# Altium PCB Modules.PcbDoc
Units mil, origin at the board's own origin, x right, y up, seen from the top; angles counter-clockwise.
Board outline 2267.75 x 2326.8 mil, 2 copper layers (Top Layer, Bottom Layer); 30 components, 60 nets, 125 pads, 7 vias.
Unrouted connection lines stored in the file: 1.
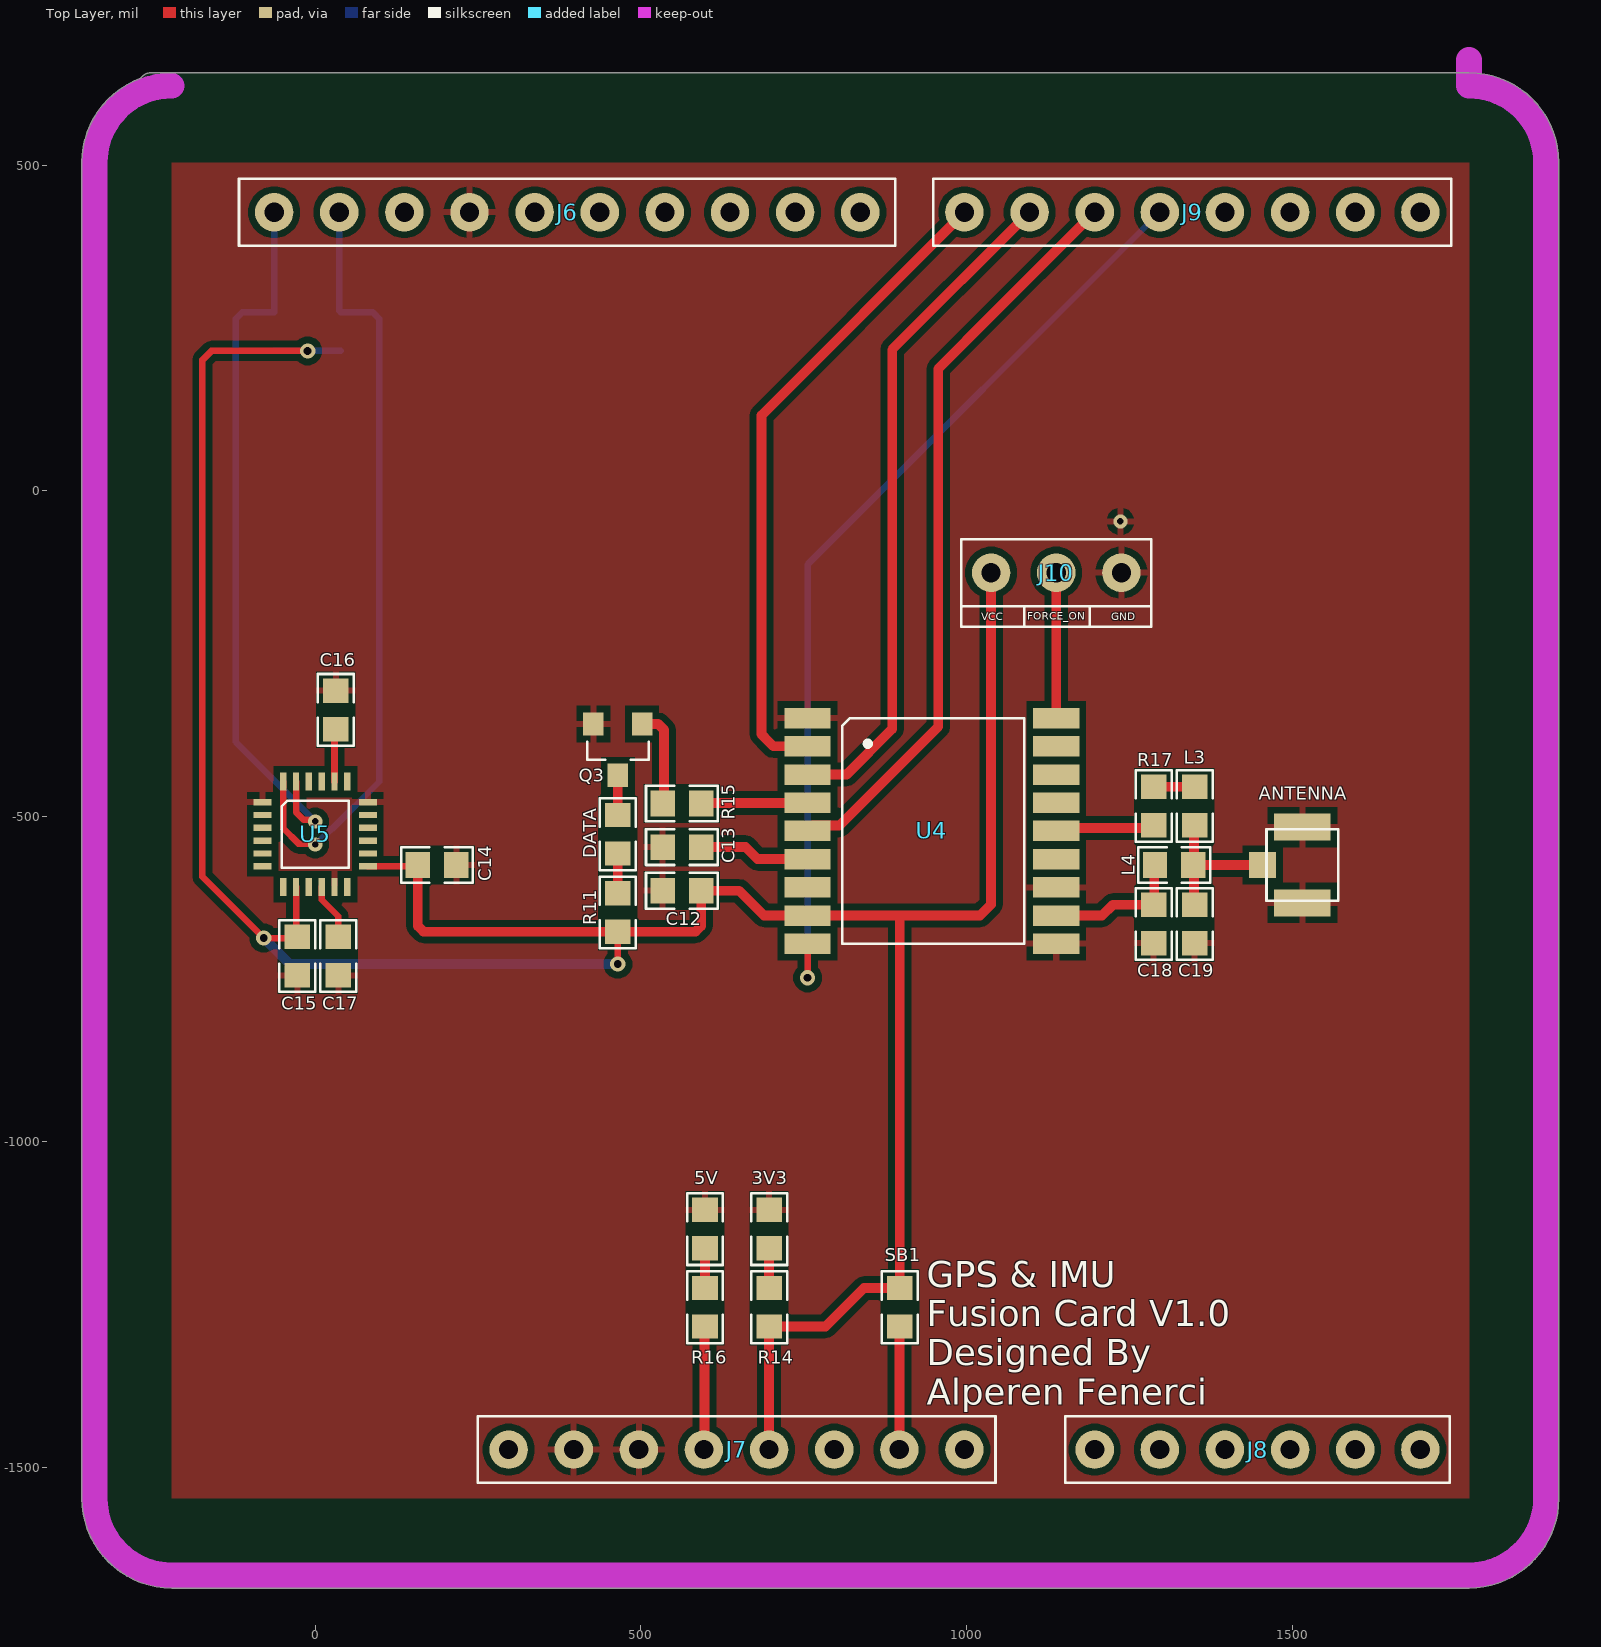
[diagram p0: Top Layer view]
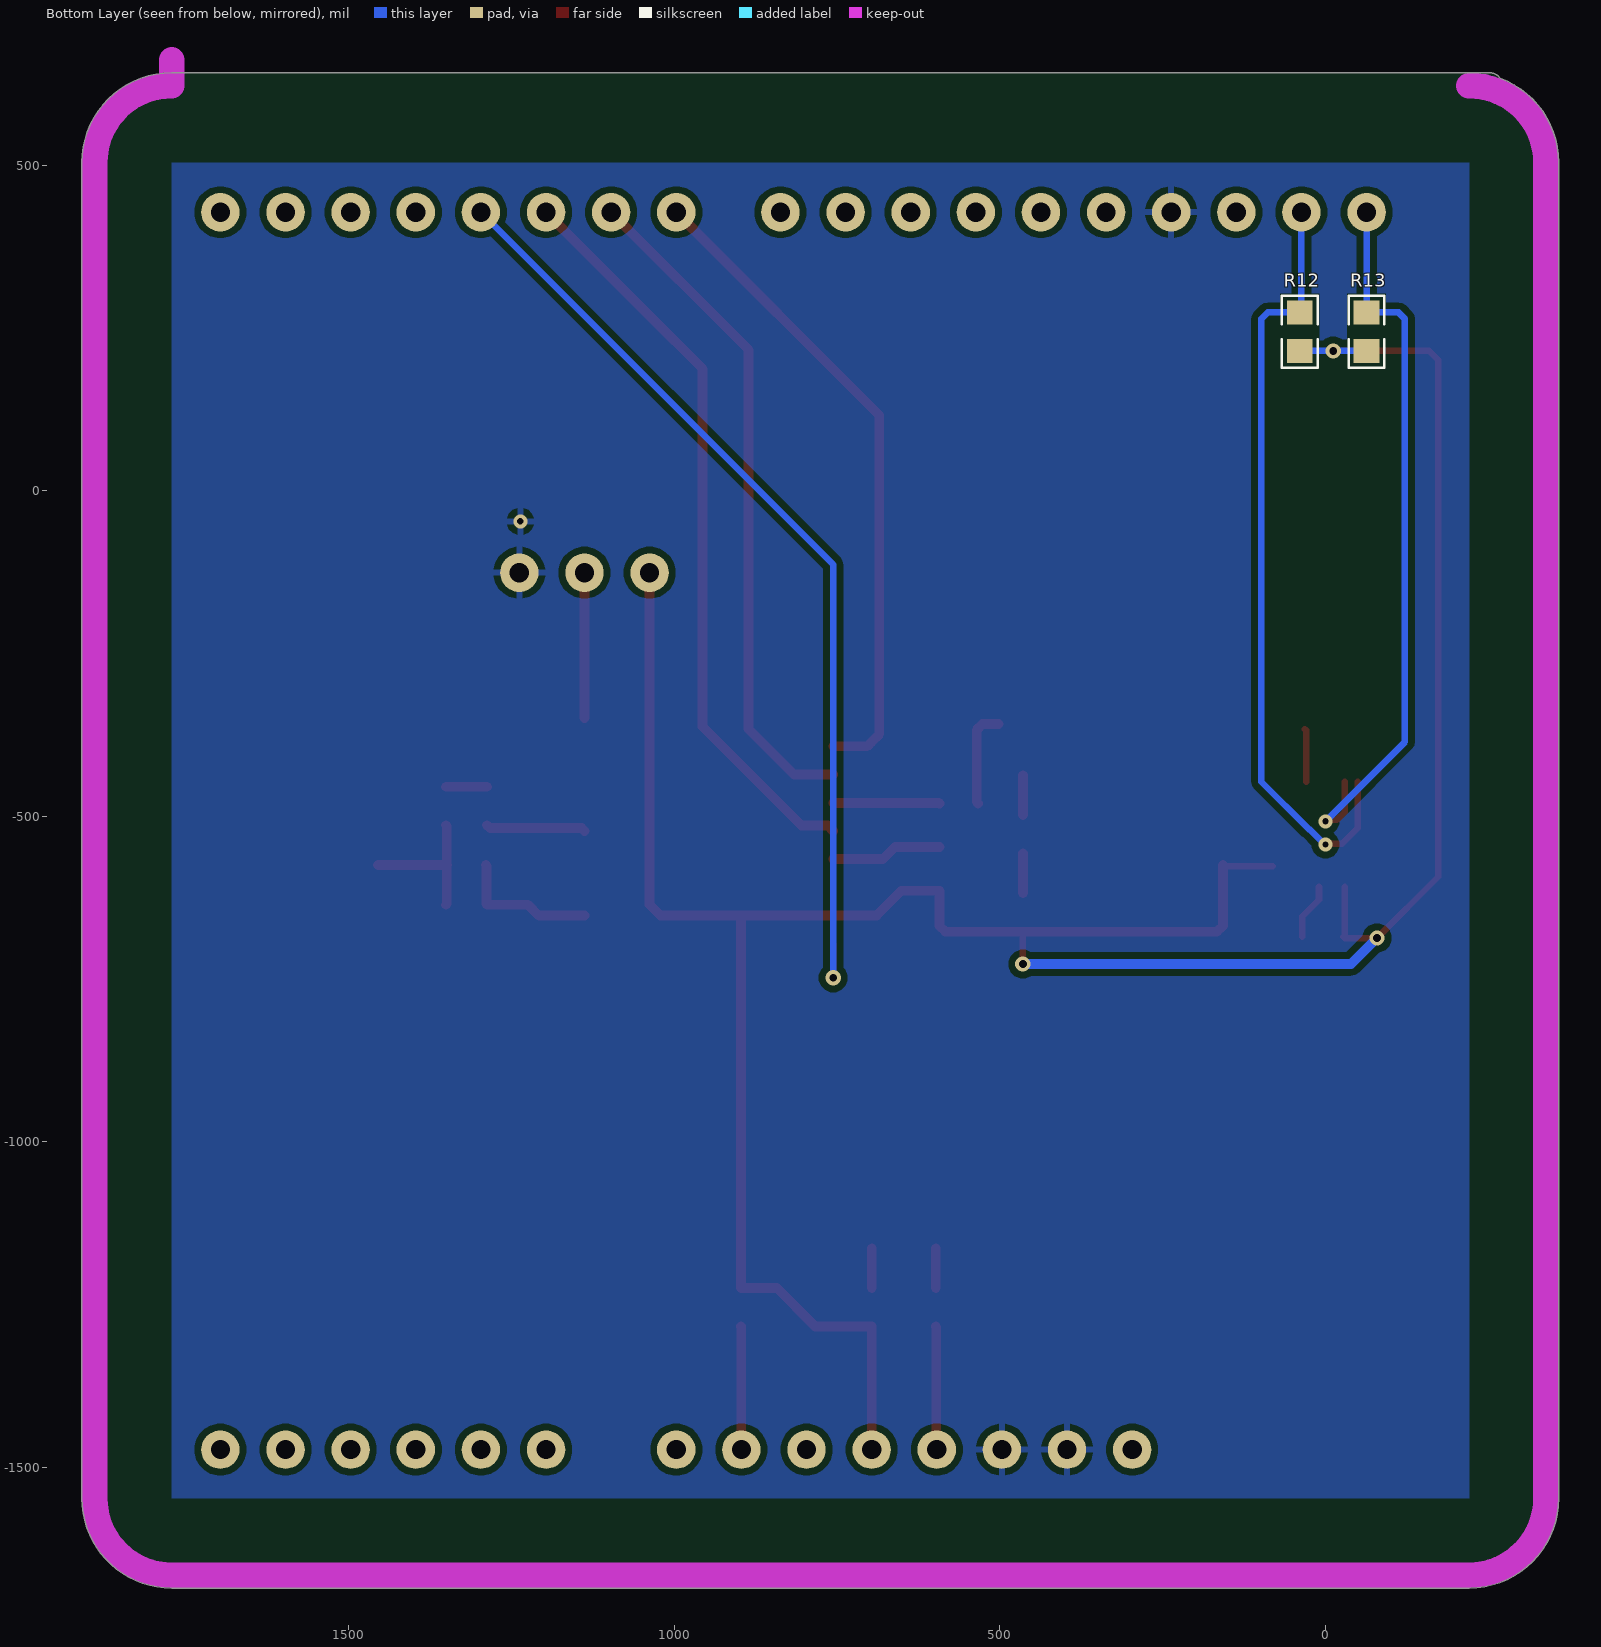
[diagram p1: Bottom Layer view, seen from below]
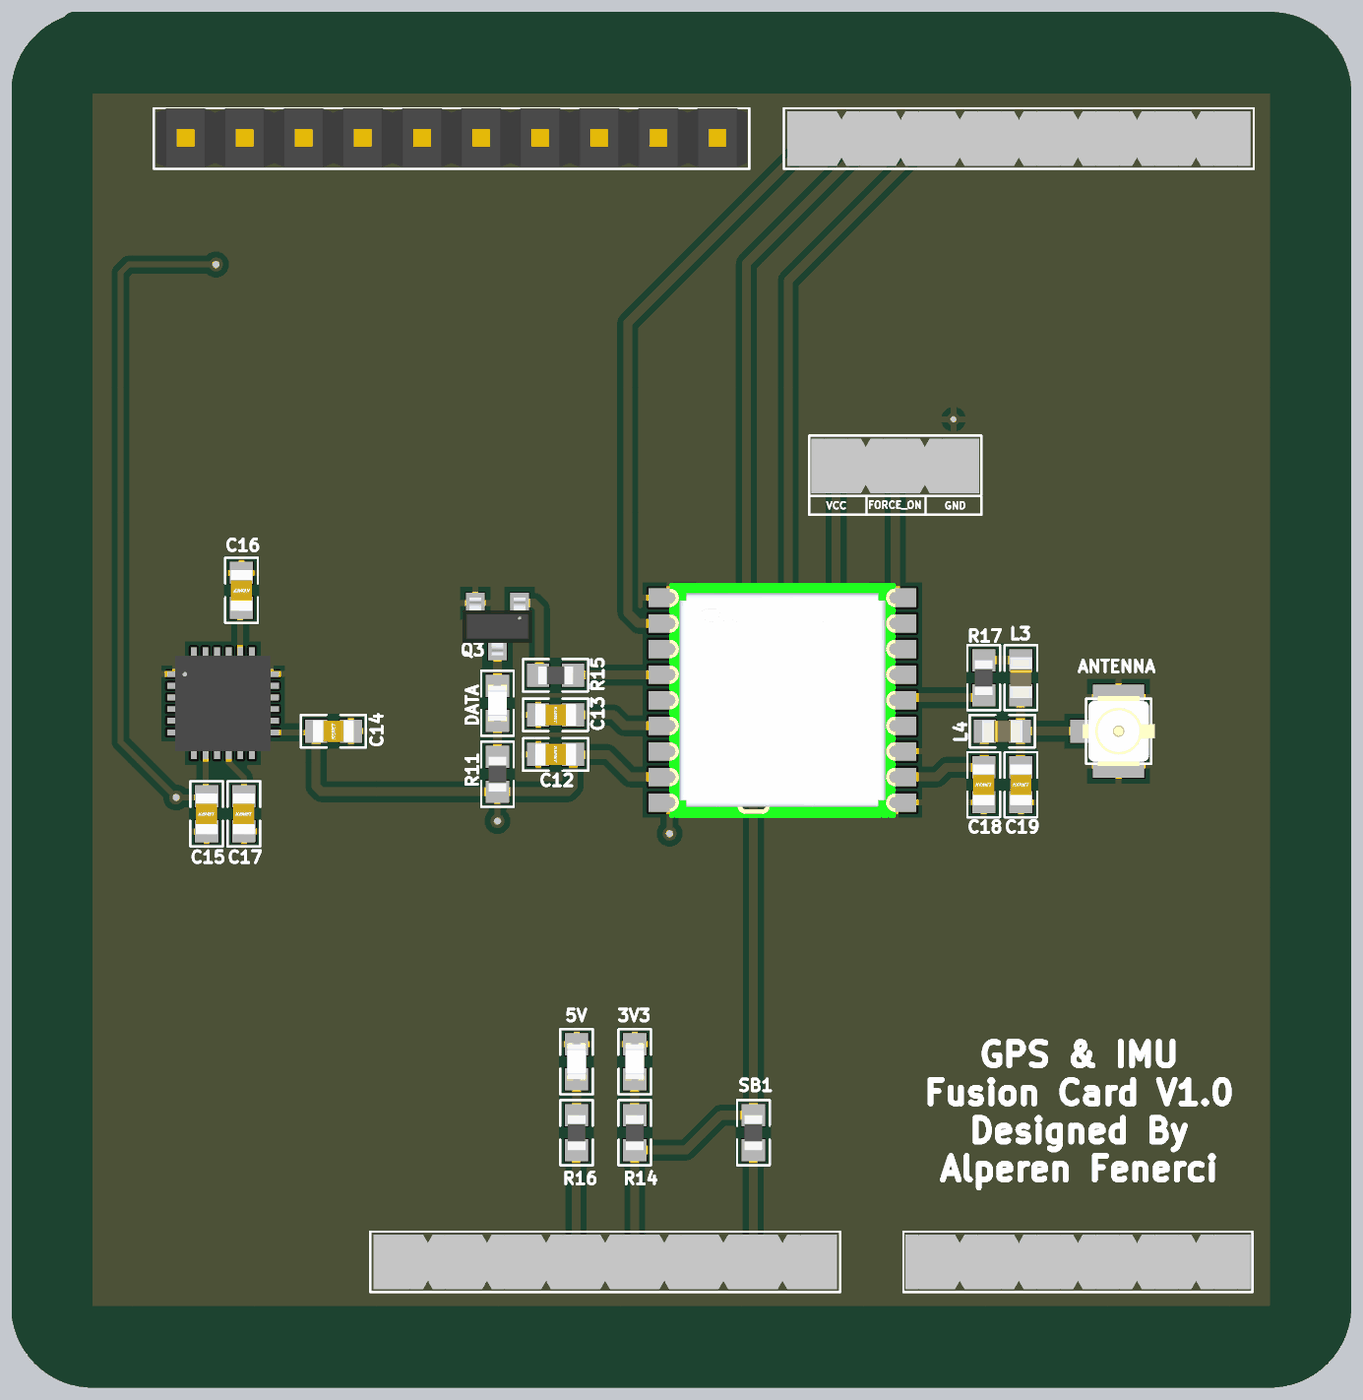
[diagram p2: 3D render of the assembled board from above, using the file's embedded part models]

## Layer stack, top to bottom
Top Solder: solder mask 0.4, Solder Resist, Dk 3.5
Top Layer: signal copper 1.4
Dielectric 1: dielectric 12.6, FR-4, Dk 4.8
Bottom Layer: signal copper 1.4
Bottom Solder: solder mask 0.4, Solder Resist, Dk 3.5

## Board outline
-358.28,-1547.36 -358.28,503.94 cw(c-220.47,503.94) -268.19,633.22 cw(c-251.97,622.05) -251.97,641.75 -220.41,641.75 1169.29,641.75 1169.35,641.75 1771.65,641.75 1771.72,641.75 cw(c1771.65,503.94) 1909.46,503.94 1909.46,-1547.14 1909.46,-1547.24 cw(c1771.65,-1547.24) 1771.65,-1685.05 -220.36,-1685.05 -220.47,-1685.05 cw(c-220.47,-1547.24)

## Design rules (kind name [scope] priority, off if disabled: settings)
Clearance [All] p1: gap=10 ignorepadtopadclearanceinfootprint=FALSE except(0: Arc-Hole Track-Hole SMDPad-Hole THPad-Hole Via-Hole Fill-Hole Poly-Hole Region-Hole Text-Hole; 8: Arc-Arc Arc-Track Arc-SMDPad Track-Track Track-SMDPad Fill-Fill Fill-Poly Fill-Region Poly-Poly Poly-Region Region-Region)
PolygonConnect [All] p1: connectstyle=Relief reliefconductorwidth=10 reliefentries=4 polygonreliefangle="90 Angle" airgapwidth=10
RoutingVias [All] p1: holewidth=28 width=50 viastyle="Through Hole" minholewidth=28 minwidth=50 maxholewidth=28 maxwidth=50
SolderMaskExpansion [All] p1: expansion=4 istentingtop=FALSE
Width [All] p1: maxlimit=50 minlimit=10 preferedwidth=10 minimp=50.000000 maximp=50.000000 favimp=50.000000
30 further rules are at their usual default settings.

## Classes and differential pairs
component class GOMSIS: 3V3 5V C12 C13 C14 C15 C16 C17 C18 C19 J6 J7 J8 J9 J10 L3 L4 Q3 R11 R12 R13 R14 R15 R16 R17 SB1 U4 U5

## Components (designator, comment, footprint, x,y, rotation, side; value= is the part's Value field where it differs from the comment)
3V3 "LTW-C191TLA" "LED 0603" 696.85,-1133.86 r270 top (schematic designator D7)
5V "LTW-C191TLA" "LED 0603" 598.43,-1133.86 r270 top (schematic designator D8)
ANTENNA "UFL Connector" "UFL CONN" 1515.75,-574.8 r270 top (schematic designator AE2)
C12 "CAP 0603" "CAP 0603" 562.99,-614.17 r180 top value=0.1uF
C13 "CAP 0603" "CAP 0603" 562.99,-547.24 r180 top value=6.8nF
C14 "CAP 0603" "CAP 0603" 187.01,-574.8 r0 top value=0.1uF
C15 "CAP 0603" "CAP 0603" -27.56,-714.57 r270 top value=0.1uF
C16 "CAP 0603" "CAP 0603" 31.5,-336.61 r90 top value=2.2nF
C17 "CAP 0603" "CAP 0603" 35.43,-714.57 r270 top value=0.1uF
C18 "CAP 0603" "CAP 0603" 1287.4,-665.35 r270 top value=10nF
C19 "CAP 0603" "CAP 0603" 1350.39,-665.35 r270 top value=10nF
DATA "LTW-C191TLA" "LED 0603" 464.57,-527.56 r270 top (schematic designator D6)
J6 "HMATHT00C101" HMATHT00C101 386.85,427.56 r0 top
J7 "HMATHT00C81" "HMATHT00C81 - DUPLICATE" 646.85,-1472.44 r180 top
J8 "5-146285-6" HMATHT00C61 1446.85,-1472.44 r180 top
J9 "HMATHT00C81" "HMATHT00C81 - DUPLICATE" 1346.85,427.56 r180 top
J10 "146285-3" HMATHT00C31 1137.8,-125.98 r0 top
L3 "IND 0603" "INDUCTOR 0603" 1350.39,-484.25 r270 top
L4 "IND 0603" "INDUCTOR 0603" 1318.9,-574.8 r0 top
Q3 "BC817-40" SOT23-3 464.57,-397.64 r180 top
R11 "RES 0603" "RESISTOR 0603" 464.57,-647.64 r270 top value=220R
R12 "RES 0603" "RESISTOR 0603" 39.37,244.09 r270 bottom value=10kR
R13 "RES 0603" "RESISTOR 0603" -62.99,244.09 r270 bottom value=10kR
R14 "RES 0603" "RESISTOR 0603" 696.85,-1253.94 r90 top value=330R
R15 "RES 0603" "RESISTOR 0603" 562.99,-480.31 r0 top value=10kR
R16 "RES 0603" "RESISTOR 0603" 598.43,-1253.94 r90 top value=330R
R17 "RES 0603" "RESISTOR 0603" 1287.4,-484.25 r90 top value=1kR
SB1 "RES 0603" "RESISTOR 0603" 897.64,-1253.94 r270 top value=1kR
U4 "L76M33" L76M33 946.85,-522.44 r180 top
U5 "MPU6050" QFN24 0,-527.56 r0 top

## Footprints (in the part's own frame and the unit in brackets; to place one, negate y for a bottom-side part, rotate by r counter-clockwise, add the part's x,y. Pads: shape width x height; smd on the part's side, far side on the other; paste and mask are expansions set on the pad)
"CAP 0603" [mm]
  rect 0.95x1 smd mask+0.05: 1(-0.75,0) 2(0.75,0)
  silkscreen extent -1.4,-0.7 1.4,0.7, body extent -0.88,-0.47 0.88,0.48, height 0.95
HMATHT00C31 [mm]
  round 1.5 hole 0.75 mask+0.05: 1(-2.54,0) 2(0,0) 3(2.54,0)
  silkscreen extent -3.7,-1.3 3.7,1.3, body extent -3.61,-1.17 3.61,1.17, height 4.58
HMATHT00C61 [mm]
  round 1.5 hole 0.75 mask+0.05: 1(-6.35,0) 2(-3.81,0) 3(-1.27,0) 4(1.27,0) 5(3.81,0) 6(6.35,0)
  silkscreen extent -7.5,-1.3 7.5,1.3, body extent -7.42,-1.17 7.42,1.17, height 4.58
"HMATHT00C81 - DUPLICATE" [mm]
  round 1.5 hole 0.75 mask+0.05: 1(-8.89,0) 2(-6.35,0) 3(-3.81,0) 4(-1.27,0) 5(1.27,0) 6(3.81,0) 7(6.35,0) 8(8.89,0)
  silkscreen extent -10.1,-1.3 10.1,1.3, body extent -9.96,-1.17 9.96,1.17, height 5.33
HMATHT00C101 [mm]
  round 1.5 hole 0.75 mask+0.05: 1(-11.43,0) 2(-8.89,0) 3(-6.35,0) 4(-3.81,0) 5(-1.27,0) 6(1.27,0) 7(3.81,0) 8(6.35,0) 9(8.89,0) 10(11.43,0)
  silkscreen extent -12.8,-1.3 12.8,1.3, body extent -12.7,-1.24 12.7,1.3, height 9.5
"INDUCTOR 0603" [mm]
  rect 0.95x1 smd mask+0.05: 1(-0.75,0) 2(0.75,0)
  silkscreen extent -1.4,-0.7 1.4,0.7, body extent -0.88,-0.47 0.88,0.47, height 0.94
L76M33 [mm]
  rect 1.8x0.8 smd: 1(4.85,-4.4) 2(4.85,-3.3) 3(4.85,-2.2) 4(4.85,-1.1) 5(4.85,0) 6(4.85,1.1) 7(4.85,2.2) 8(4.85,3.3) 9(4.85,4.4) 10(-4.85,4.4) 11(-4.85,3.3) 12(-4.85,2.2) 13(-4.85,1.1) 14(-4.85,0) 15(-4.85,-1.1) 16(-4.85,-2.2) 17(-4.85,-3.3) 18(-4.85,-4.4)
  silkscreen extent -3.6,-4.4 3.5,4.4, body extent -4.85,-5.05 4.85,5.05, height 2.5
"LED 0603" [mm]
  rect 0.95x1 smd mask+0.05: 1(-0.75,0) 2(0.75,0)
  silkscreen extent -1.4,-0.7 1.4,0.7, body extent -0.8,-0.4 0.8,0.4, height 0.65
QFN24 [mm]
  rect 0.7x0.25 smd: 1(-2.05,1.25) 2(-2.05,0.75) 3(-2.05,0.25) 4(-2.05,-0.25) 5(-2.05,-0.75) 6(-2.05,-1.25) 13(2.05,-1.25) 14(2.05,-0.75) 15(2.05,-0.25) 16(2.05,0.25) 17(2.05,0.75) 18(2.05,1.25)
  rect 0.25x0.7 smd: 7(-1.25,-2.05) 8(-0.75,-2.05) 9(-0.25,-2.05) 10(0.25,-2.05) 11(0.75,-2.05) 12(1.25,-2.05) 19(1.25,2.05) 20(0.75,2.05) 21(0.25,2.05) 22(-0.25,2.05) 23(-0.75,2.05) 24(-1.25,2.05)
  silkscreen extent -1.3,-1.3 1.3,1.3, body extent -2.05,-2.05 2.05,2.05, height 0.8
"RESISTOR 0603" [mm]
  rect 0.95x1 smd mask+0.05: 1(-0.75,0) 2(0.75,0)
  silkscreen extent -1.4,-0.7 1.4,0.7, body extent -0.76,-0.38 0.76,0.38, height 0.36
SOT23-3 [mm]
  rect 0.8x0.9 smd mask+0.05: 1(-0.95,-1) 2(0.95,-1) 3(0,1)
  silkscreen extent -1.2,-0.3 1.2,0.4, body extent -1.5,-1.24 1.5,1.24, height 1.17
"UFL CONN" [mm]
  rect 1x1.05 smd mask+0.05: 1(0,-1.55)
  rect 1.05x2.2 smd mask+0.05: 2(-1.475,0) 2(1.475,0)
  silkscreen extent -1.4,-1.4 1.4,1.4, body extent -1.5,-1.55 1.5,1.55, height 1.3

## Part data
3V3 5V DATA: library part "LED 0603", "Chip LED", Case/Package=0603
ANTENNA: "Antenna Connector"
C12 C13 C14 C15 C16 C17 C18 C19: "Multilayer Ceramic Capacitor", Capacitor Type=MLCC, Case/Package=0603
J6 J7 J9: "Header for PCB"
J8: library part HMATHT00C61, "Header for PCB"
J10: library part HMATHT00C31, "Header for PCB"
L3 L4: "SMD Inductor"
Q3: "Transistor BJT", Case/Package=SOT23, Current=500mA, Voltage=45V, Transistor Type=NPN
R11 R12 R13 R14 R15 R16 R17 SB1: "SMD Chip Resistor", Case/Package=0603
U4: "GPS, GLONASS, GNSS Transceiver"
U5: "IMU"

## Via types
v1: diameter 23.62, hole 11.81, Top Layer to Bottom Layer, 4 vias
v2: diameter 21.65, hole 9.84, Top Layer to Bottom Layer, 3 vias

## Nets (pads, with @x,y where several pads share a name; then routed paths per layer and width w, separated by ;. In a path a pad name is that pad's centre, name@x,y a point inside that pad or via, vN(x,y) a via of type N, cw(c..) or ccw(c..) an arc to the next point about the centre after c; other vN are vias at no path point)
3V3: 
5V: 
GND: 3V3.1 5V.1 ANTENNA.2 C12.2 C13.2 C14.2 C15.2 C16.2 C17.2 C18.2 C19.2 J6.4 J7.6 J7.7 J10.3 Q3.2 U4.1 U4.10 U4.12 U5.1 U5.11 U5.18
  other v2: 1236.22,-47.24
GPS_RST: J9.5 U4.9 | length 1452
  Top Layer w10: v1(755.91,-748.03) U4.9
  Bottom Layer w10: v1(755.91,-748.03) 755.91,-113.39 J9.5
GPS_RX: J9.8 U4.2 | length 1009.3
  Top Layer w15: U4.2 703.54,-392.52 696.86,-385.83 685.04,-374.02 685.04,115.75 J9.8
GPS_STD: J9.6 U4.5 | length 1156.4
  Top Layer w15: U4.5 764.15,-514.19 804.7,-514.19 956.69,-362.2 956.69,187.4 1040.94,271.65 J9.6
GPS_TX: J9.7 U4.3 | length 1039.9
  Top Layer w15: U4.3 816.14,-435.83 885.83,-366.14 885.83,216.54 J9.7
H_3V3: C12.1 C14.1 C15.1 J7.4 J10.1 R11.2 R12.2 R13.2 R14.1 SB1.1 U4.8 U5.8 U5.13 | length 4567.6
  Top Layer w10: U5.8 -29.53,-683.07 C15.1 -29.45,-686.93 v1(-79.15,-686.93) -173.23,-592.85 -173.23,200.79 -159.45,214.57 v1(-11.81,214.57) ; U5.13 155.51,-576.77 C14.1 ; v1(464.57,-726.87) R11.2
  Top Layer w15: C14.1 157.48,-668.38 166.27,-677.17 R11.2 583.73,-677.17 592.52,-668.38 C12.1 650.88,-614.17 689.06,-652.36 U4.8 897.64,-652.36 ; J7.4 R14.1 783.46,-1283.46 842.52,-1224.41 SB1.1 897.64,-652.36 ; J10.1 1037.8,-635.43 1020.87,-652.36 897.64,-652.36
  Bottom Layer w10: R13.2 v1(-11.81,214.57) R12.2
  Bottom Layer w15: v1(-79.15,-686.93) -39.21,-726.87 v1(464.57,-726.87)
H_5V5: J7.5 R16.1 | length 189.6
  Top Layer w15: J7.5 597.64,-1471.65 597.64,-1284.25 R16.1
NetAE1_1: 
NetAE2_1: ANTENNA.1 C19.1 L3.2 L4.2 | length 230
  Top Layer w15: C19.1 1349.41,-634.84 1349.41,-575.79 L4.2 ; L3.2 1349.41,-514.76 1349.41,-573.82 L4.2 ; ANTENNA.1 L4.2
NetC5_1: 
NetC6_1: 
NetC7_1: 
NetC9_1: 
NetC10_1: 
NetC13_1: C13.1 U4.6 | length 171.1
  Top Layer w15: C13.1 660.72,-547.24 679.22,-565.75 U4.6
NetC16_1: C16.1 U5.20 | length 81.5
  Top Layer w10: U5.20 29.53,-368.11 C16.1
NetC17_1: C17.1 U5.10 | length 87.4
  Top Layer w10: U5.10 9.92,-608.35 9.92,-628.03 35.43,-653.54 C17.1
NetC18_1: C18.1 L4.1 U4.11 | length 218.3
  Top Layer w15: U4.11 1208.08,-652.36 1224.62,-635.83 C18.1 1288.39,-634.84 1288.39,-575.79 L4.1
NetD1_2: 
NetD2_1: 
NetD2_2: 
NetD3_2: 
NetD4_2: 
NetD5_1: 
NetD5_2: 
NetD6_1: DATA.1 Q3.3 | length 61
  Top Layer w15: DATA.1 Q3.3
NetD6_2: DATA.2 R11.1 | length 61
  Top Layer w15: R11.1 DATA.2
NetD7_2: 3V3.2 R14.2 | length 61
  Top Layer w15: R14.2 3V3.2
NetD8_2: 5V.2 R16.2 | length 61
  Top Layer w15: R16.2 5V.2
NetJ1_2: 
NetJ1_3: 
NetJ1_4: 
NetJ1_5: 
NetJ2_2: 
NetJ3_2: 
NetJ3_3: 
NetJ3_4: 
NetJ3_5: 
NetJ3_6: 
NetJ4_2: 
NetJ4_3: 
NetJ4_4: 
NetJ4_5: 
NetJ5_2: 
NetJ7_2: J7.2 SB1.2 | length 189.3
  Top Layer w15: J7.2 897.24,-1472.05 897.24,-1283.86 SB1.2
NetJ10_2: J10.2 U4.18 | length 223.2
  Top Layer w15: U4.18 J10.2
NetL1_1: 
NetL3_1: L3.1 R17.2 | length 63
  Top Layer w15: R17.2 L3.1
NetQ1_1: 
NetQ2_1: 
NetQ3_1: Q3.1 R15.1 | length 151.2
  Top Layer w15: Q3.1 526.65,-358.27 535.43,-367.05 535.43,-478.35 R15.1
NetR3_2: 
NetR9_1: 
NetR10_2: 
NetR15_2: R15.2 U4.4 | length 163.9
  Top Layer w15: R15.2 593.11,-479.72 755.31,-479.72 U4.4
NetR17_1: R17.1 U4.14 | length 153.2
  Top Layer w15: U4.14 1142.13,-518.11 1283.07,-518.11 R17.1
SCL_MPU: J6.1 R13.1 U5.23 | length 1121.7
  Top Layer w10: U5.23 -29.53,-493.81 -17.69,-505.64 -2.23,-505.64 v2(0,-507.87)
  Bottom Layer w10: J6.1 -63.15,273.78 R13.1 -112.2,273.62 -122.05,263.78 -122.05,-385.83 v2(0,-507.87)
SDA_MPU: J6.2 R12.1 U5.24 | length 1198.3
  Top Layer w10: U5.24 -49.21,-518.5 -25.83,-541.89 -1.42,-541.89 v2(0,-543.31)
  Bottom Layer w10: v2(0,-543.31) 1.09,-543.31 24.71,-519.68 25.64,-519.68 98.43,-446.9 98.42,263.78 88.58,273.62 R12.1 36.85,276.14 J6.2
pads on no net: J6.3 J6.5 J6.6 J6.7 J6.8 J6.9 J6.10 J7.1 J7.3 J7.8 J8.1 J8.2 J8.3 J8.4 J8.5 J8.6 J9.1 J9.2 J9.3 J9.4 U4.7 U4.13 U4.15 U4.16 U4.17 U5.2 U5.3 U5.4 U5.5 U5.6 U5.7 U5.9 U5.12 U5.14 U5.15 U5.16 U5.17 U5.19 U5.21 U5.22

## Polygon pours and split planes (outlines as drawn)
GND on Bottom Layer "GND_L02_P009" (solid, remove dead copper, pour order 9): 1771.65,503.94 -220.47,503.94 -220.47,-1547.24 1771.65,-1547.24
GND on Top Layer "GND_L01_P010" (solid, remove dead copper, pour order 10): 1771.65,503.94 -220.47,503.94 -220.47,-1547.24 1771.65,-1547.24

## Keep-outs
Keep-Out Layer:
  lines w39.37: -220.47,622.05 ccw(c-220.47,503.94) -338.58,503.94 -338.58,-1547.24 ccw(c-220.47,-1547.24) -220.47,-1665.35 1771.65,-1665.35 ccw(c1771.65,-1547.24) 1889.76,-1547.24 1889.76,503.94 ccw(c1771.65,503.94) 1771.65,622.05 ; 1771.65,661.42 1771.65,622.05 ; 1771.65,622.05 1771.65,622.05

## Silkscreen, mask and mechanical layers (free items; w line width, h text height)
Top Overlay:
  lines w3.94: 992.13,-177.17 992.13,-208.66 1283.46,-208.66 1283.46,-177.17 ; 1088.98,-208.66 1088.98,-177.17 ; 1188.98,-208.66 1188.98,-177.17
  text "FORCE_ON" at 1092.93,-197.83 h11.81
  text "VCC" at 1022.45,-198.82 h11.81
  text "GND" at 1222.45,-198.82 h11.81
  text "GPS & IMU  / Fusion Card V1.0 / Designed By / Alperen Fenerci" at 938.98,-1403.27 h40
Route Tool Path:
  lines w39.37: -251.97,622.05 1169.29,622.05 ; -220.47,622.05 ccw(c-220.47,503.94) -338.58,503.94 -338.58,-1547.24 ccw(c-220.47,-1547.24) -220.47,-1665.35 1771.65,-1665.35 ccw(c1771.65,-1547.24) 1889.76,-1547.24 1889.76,503.94 ccw(c1771.65,503.94) 1771.65,622.05 1161.42,622.05